# EAGLE board NusbioMCU_NeoPixels (EAGLE 7.6.0)
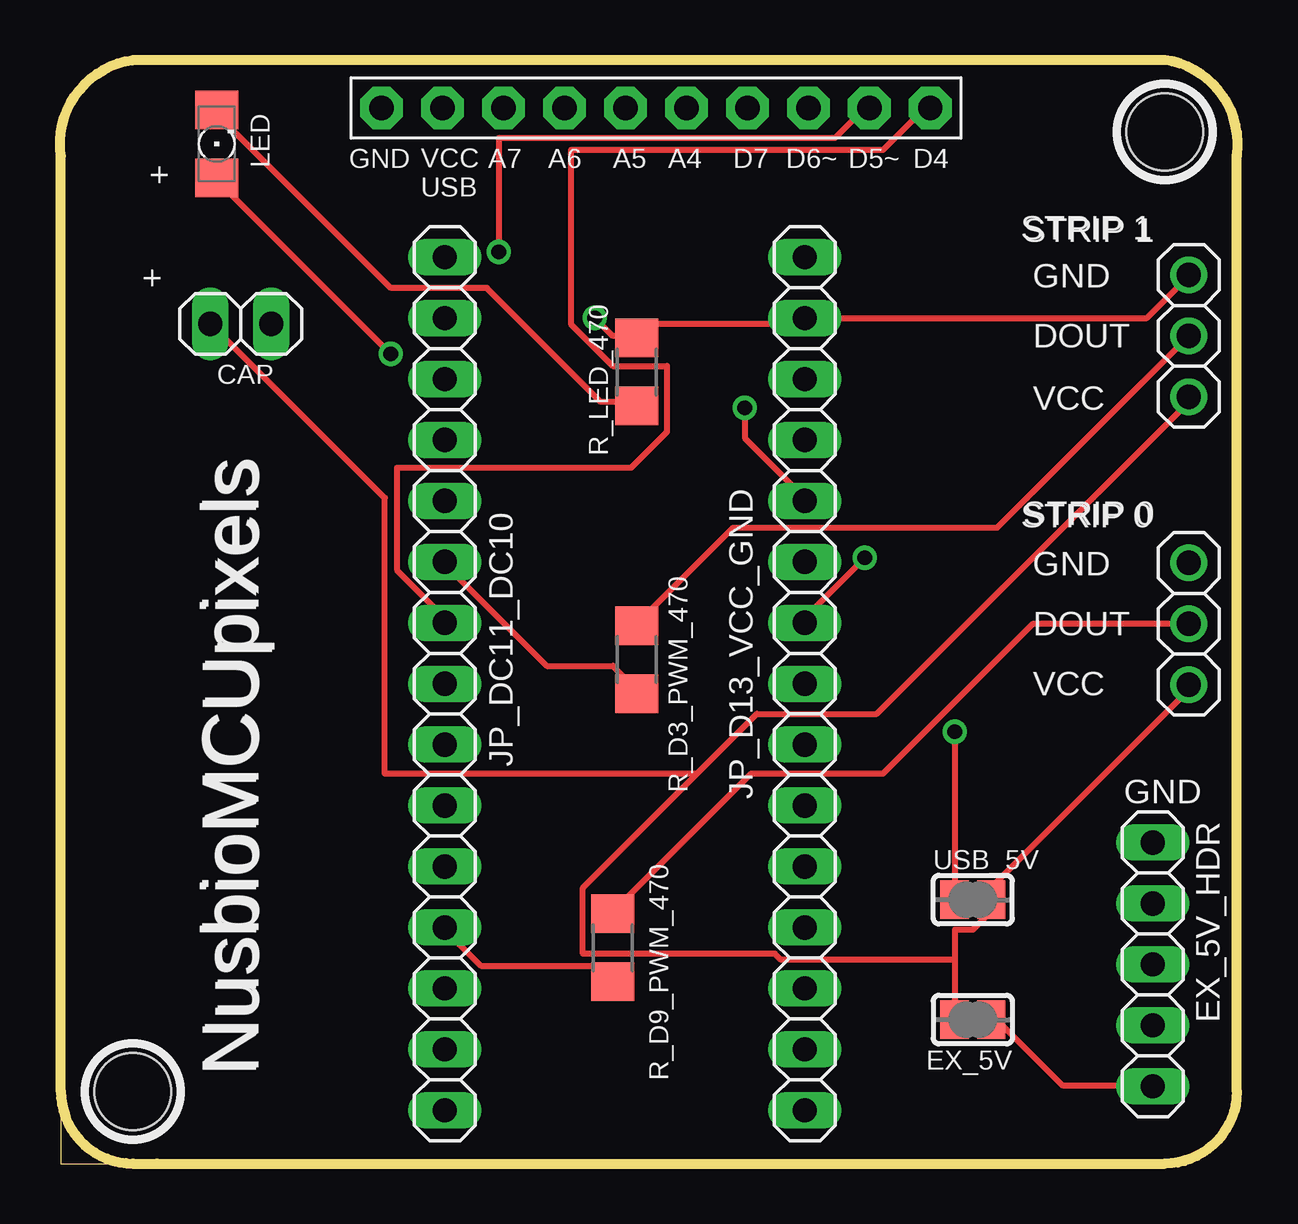
[diagram p0: board, top side]
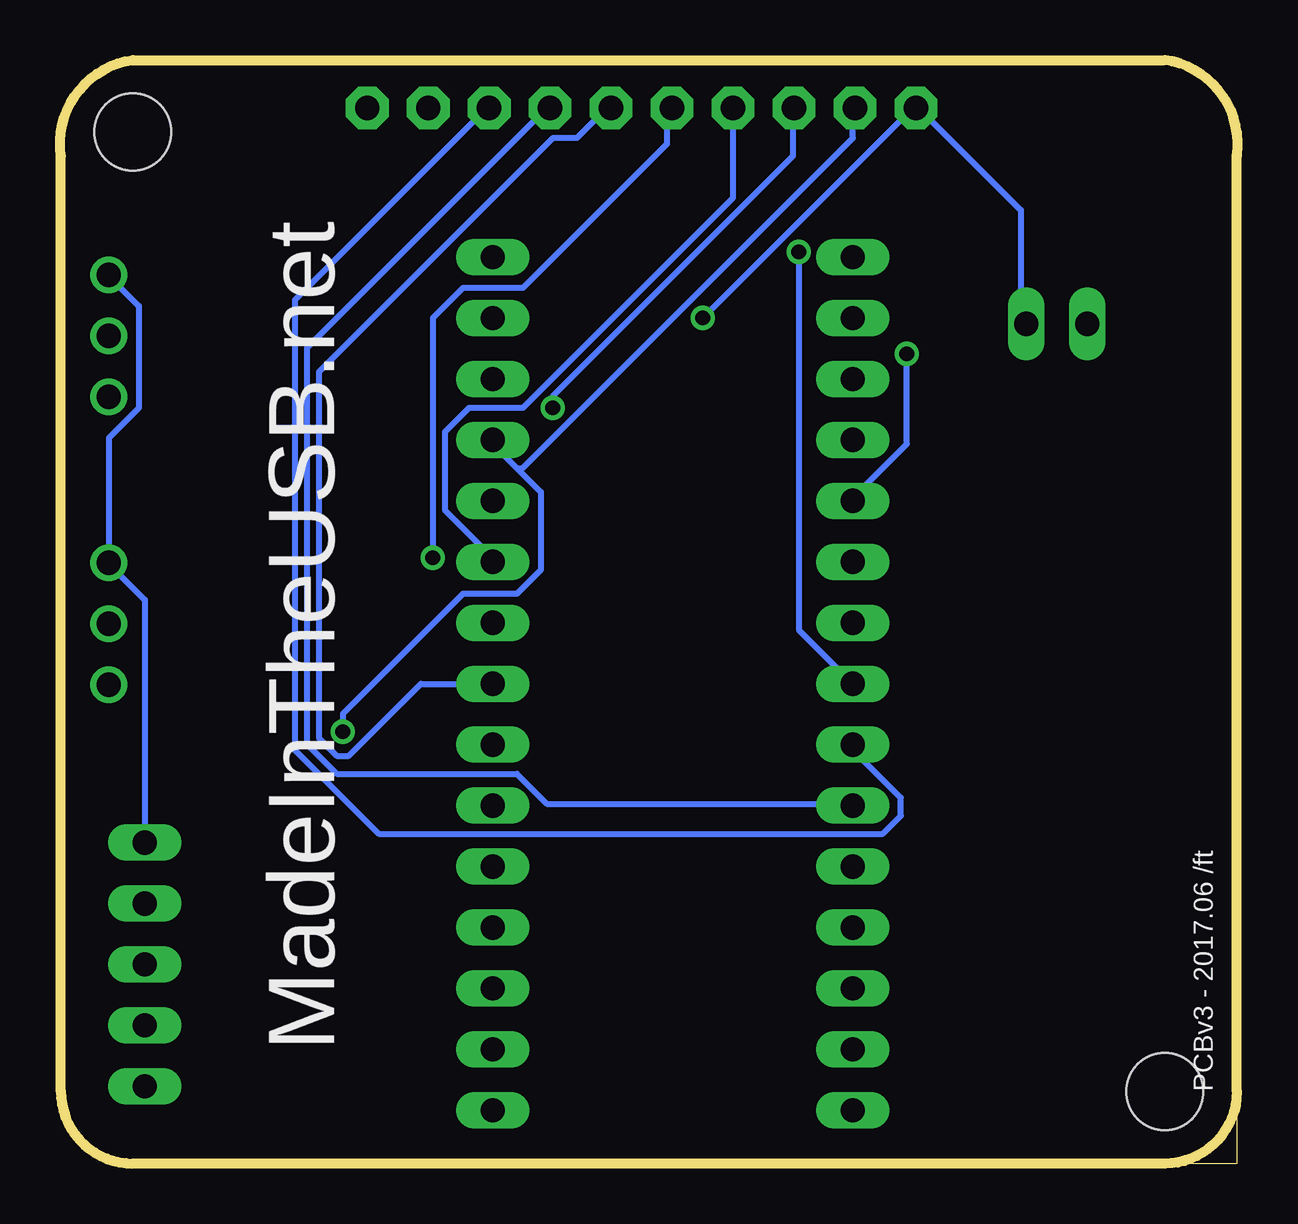
[diagram p1: board, bottom side, seen from below]

Size 49.06 x 46 mm. Coordinates in mm from the lower left corner, seen from the top.
Outline: 4.03,0 0.03,0 0.03,3
Outline: 46.03,0 24.03,0
Outline: 0.03,42 0.03,40.5
Outline: 0.03,3 arc90 3.03,0 4.03,0
Outline: 4.03,0 46.03,0
Outline: 46.03,0 arc90 49.03,3 49.03,42 arc90 46.03,46 3.03,46 arc90 0.03,42
Outline: 0.03,3 0.03,42
Copper layers (1*16): Top 0.035mm / dielectric 1.5mm / Bottom 0.035mm
Design rules "default": minimum track width 10mil, minimum drill 24mil, track to track 8mil, track to pad 8mil, pad to pad 8mil, via to via 8mil, smd to smd 8mil, copper to edge 40mil, drill to drill 8mil, minimum pad ring 10mil, minimum via ring 8mil, stop-mask expansion 4mil, vias tented up to drill 0mil, thermal gap 10mil
Holes 3.2 mm at 3.03,3 46.03,43

## Footprints (pad centres in the part's own frame; a part is rotated, then mirrored left to right if it is on the bottom)
1X02 = drill 1.016 long: 1 -1.27,0; 2 1.27,0
1X10-BIG = drill 1.016 pad 1.778 octagon: 1 -11.43,0; 2 -8.89,0; 3 -6.35,0; 4 -3.81,0; 5 -1.27,0; 6 1.27,0; 7 3.81,0; 8 6.35,0; 9 8.89,0; 10 11.43,0
SOLDERJUMPER_REFLOW = smd 1.168 x 1.6: 1 -0.762,0; 2 0.762,0
1X05 = drill 1.016 long: 1 -5.08,0; 2 -2.54,0; 3 0,0; 4 2.54,0; 5 5.08,0
1X15 = drill 1.016 long: 1 -17.78,0; 2 -15.24,0; 3 -12.7,0; 4 -10.16,0; 5 -7.62,0; 6 -5.08,0; 7 -2.54,0; 8 0,0; 9 2.54,0; 10 5.08,0; 11 7.62,0; 12 10.16,0; 13 12.7,0; 14 15.24,0; 15 17.78,0
1206 = smd 1.6 x 1.803: A -1.422,0; C 1.422,0
R1206 = smd 1.6 x 1.803: 1 -1.422,0; 2 1.422,0
1X03 = drill 1.016: 1 -2.54,0; 2 0,0; 3 2.54,0

## Placement (x,y rotation side)
CAP  [1X02]  7.53,35 0 top
DX_AX_PINS  PINHD-1X10  [1X10-BIG]  24.83,44 0 top
EX_5V  [SOLDERJUMPER_REFLOW]  38.03,6 180 top
EX_5V_HDR  [1X05]  45.53,8.3 90 top
JP_D13_VCC_GND  [1X15]  31.03,20 270 top
JP_DC11_DC10  [1X15]  16.03,20 270 top
LED  [1206]  6.53,42.5 90 top
R_D3_PWM_470  [R1206]  24.03,21 270 top
R_D9_PWM_470  [R1206]  23.03,9 90 top
R_LED_470  [R1206]  24.03,33 90 top
STRIP0  [1X03]  47.03,22.5 270 top
STRIP1  [1X03]  47.03,34.5 270 top
USB_5V  [SOLDERJUMPER_REFLOW]  38.03,11 0 top

## Library data of the parts
CAP EX_5V_HDR = pinhead
DX_AX_PINS JP_D13_VCC_GND JP_DC11_DC10 LED R_D3_PWM_470 R_D9_PWM_470 R_LED_470 STRIP0 STRIP1 = adafruit
EX_5V USB_5V = microbuilder

## Nets
A0: JP_D13_VCC_GND.12
A1: JP_D13_VCC_GND.11
A2: JP_D13_VCC_GND.10
A3: JP_D13_VCC_GND.9
A4: DX_AX_PINS.6 JP_D13_VCC_GND.8
A5: DX_AX_PINS.5 JP_D13_VCC_GND.7
A6: DX_AX_PINS.4 JP_D13_VCC_GND.6
A7: DX_AX_PINS.3 JP_D13_VCC_GND.5
D2_SECURITY: JP_DC11_DC10.5 LED.A
D3_PWM_IN: R_D3_PWM_470.1 STRIP1.2
D3_PWM_OUT: JP_DC11_DC10.6 R_D3_PWM_470.2
D4: DX_AX_PINS.10 JP_DC11_DC10.7
D5_PWM: DX_AX_PINS.9 JP_DC11_DC10.8
D6_PWM: DX_AX_PINS.8 JP_DC11_DC10.9
D7: DX_AX_PINS.7 JP_DC11_DC10.10
D8: JP_DC11_DC10.11
D9_PWM_IN: R_D9_PWM_470.2 STRIP0.2
D9_PWM_OUT: JP_DC11_DC10.12 R_D9_PWM_470.1
D13_SCK: JP_D13_VCC_GND.15
DC10_CS: JP_DC11_DC10.13
DC11_MOSI: JP_DC11_DC10.14
DC12_MISO: JP_DC11_DC10.15
EX_VCC_5V: EX_5V.1 EX_5V_HDR.1
GND: CAP.2 DX_AX_PINS.1 EX_5V_HDR.5 JP_D13_VCC_GND.2 R_LED_470.2 STRIP0.1 STRIP1.1
LED_VCC: CAP.1 EX_5V.2 STRIP0.3 STRIP1.3 USB_5V.2
N$1: LED.C R_LED_470.1
VCC: DX_AX_PINS.2 JP_D13_VCC_GND.4 USB_5V.1

## Tracks (layer width: path | path; a pad name or v marks a point on that pad's centre or on a via)
A4
  Bottom 0.254: JP_D13_VCC_GND.8 34.03,20 37.03,17 37.53,17 38.28,17.75 38.28,33 28.53,42.75 27.53,42.75 26.28,44 DX_AX_PINS.6
A5  (via drill 0.61)
  Top 0.254: v33.53,25.25 31.03,22.75 JP_D13_VCC_GND.7
  Bottom 0.254: v33.53,25.25 33.53,35.25 32.28,36.5 29.78,36.5 23.78,42.5 23.78,44 DX_AX_PINS.5
A6
  Bottom 0.254: JP_D13_VCC_GND.6 31.03,25.25 33.03,27.25 33.03,30.5 32.03,31.5 29.78,31.5 21.03,40.25 DX_AX_PINS.4
A7  (via drill 0.61)
  Top 0.254: v28.53,31.5 28.53,30.25 31.03,27.75 JP_D13_VCC_GND.5
  Bottom 0.254: v28.53,31.5 28.53,32 18.53,42 18.53,44 DX_AX_PINS.3
D2_SECURITY  (via drill 0.61)
  Top 0.254: v13.78,33.75 6.53,41 LED.A
  Bottom 0.254: v13.78,33.75 13.78,30 16.03,27.75 JP_DC11_DC10.5
D3_PWM_IN
  Top 0.254: STRIP1.2 39.03,26.5 28.03,26.5 24.03,22.5 R_D3_PWM_470.1
D3_PWM_OUT
  Top 0.254: R_D3_PWM_470.2 24.03,19.75 23.03,20.75 20.28,20.75 16.03,25 JP_DC11_DC10.6
D4
  Top 0.254: JP_DC11_DC10.7 16.03,22.75 14.03,24.75 14.03,29 23.78,29 25.28,30.5 25.28,33.25 23.03,33.25 21.28,35 21.28,42.25 34.28,42.25 36.03,44 DX_AX_PINS.10
D5_PWM  (via drill 0.61)
  Top 0.254: v18.28,38 18.28,42.75 32.28,42.75 33.53,44 DX_AX_PINS.9
  Bottom 0.254: JP_DC11_DC10.8 18.28,22.25 v18.28,38
D6_PWM
  Bottom 0.254: JP_DC11_DC10.9 16.03,17.25 14.03,15.25 14.03,14.5 14.78,13.75 35.78,13.75 39.28,17.25 39.28,36 31.28,44 DX_AX_PINS.8
D7
  Bottom 0.254: JP_DC11_DC10.10 16.03,15 28.78,15 30.03,16.25 37.53,16.25 38.78,17.5 38.78,34 28.78,44 DX_AX_PINS.7
D9_PWM_IN
  Top 0.254: STRIP0.2 40.53,22.5 34.28,16.25 28.78,16.25 23.03,10.5 R_D9_PWM_470.2
D9_PWM_OUT
  Top 0.254: R_D9_PWM_470.1 23.03,7.75 22.53,8.25 17.53,8.25 16.03,9.75 JP_DC11_DC10.12
EX_VCC_5V
  Top 0.254: EX_5V.1 39.03,6 41.78,3.25 45.53,3.25 EX_5V_HDR.1
GND  (via drill 0.61)
  Top 0.254: 24.03,34.5 24.53,35 31.03,35 JP_D13_VCC_GND.2 45.28,35.25 47.03,37 STRIP1.1 | v22.28,35.25 23.03,34.5 24.03,34.5 | 24.03,34.5 R_LED_470.2
  Bottom 0.254: CAP.2 9.03,35 9.03,39.75 13.28,44 DX_AX_PINS.1 13.53,44 v22.28,35.25 | EX_5V_HDR.5 45.53,23.5 47.03,25 STRIP0.1 47.03,30.25 45.78,31.5 45.78,35.75 47.03,37 STRIP1.1
LED_VCC
  Top 0.254: 37.28,8.5 37.28,9.75 38.03,9.75 38.78,10.5 USB_5V.2 39.03,11 39.03,11.75 47.03,19.75 STRIP0.3 | 37.28,8.5 EX_5V.2 | 26.53,16.25 21.78,11.5 21.78,8.75 29.78,8.75 30.03,8.5 37.28,8.5 | 26.53,16.25 29.03,18.75 34.03,18.75 47.03,31.75 STRIP1.3 | 26.53,16.25 13.53,16.25 13.53,27.75 6.28,35 CAP.1
N$1
  Top 0.254: LED.C 6.53,43.75 13.78,36.5 17.78,36.5 22.53,31.75 24.03,31.75 R_LED_470.1
VCC  (via drill 0.61)
  Top 0.254: v37.28,18 USB_5V.1
  Bottom 0.254: v37.28,18 37.28,18.75 32.28,23.75 30.03,23.75 29.03,24.75 29.03,28 30.03,29 | 30.03,29 31.03,30 JP_D13_VCC_GND.4 | 30.03,29 29.78,29 16.03,42.75 16.03,44 DX_AX_PINS.2

## Text on the board
tNames: GND | A7 | A6 | A5 | A4 | D7 | D6~ | D5~ | D4 | + | VCC / USB | STRIP 1 | STRIP 1 | + | GND | DOUT | VCC | STRIP 0 | STRIP 0 | GND | DOUT | VCC | NusbioMCUpixels | NusbioMCUpixels | GND
bNames: MadeInTheUSB.net | PCBv3 - 2017.06 /ft